# EAGLE board Task 6 - T-Junction (EAGLE 9.7.0)

Size 250.74 x 238.51 mm. Coordinates in mm from the lower left corner, seen from the top.
Outline: 0,0 250.74,0 250.74,238.51 0,238.51 0,0
Copper layers (1*16): Top 0.035mm / dielectric 1.5mm / Bottom 0.035mm
Design rules "default": minimum track width 6mil, minimum drill 0.35mm, track to track 6mil, track to pad 6mil, pad to pad 6mil, via to via 6mil, smd to smd 6mil, copper to edge 40mil, drill to drill 6mil, minimum pad ring 10mil, minimum via ring 8mil, stop-mask expansion 4mil, vias tented up to drill 0mil, thermal gap 10mil

## Footprints (pad centres in the part's own frame; a part is rotated, then mirrored left to right if it is on the bottom)
LEDRD254W60D565H860B = drill 0.981 pad 1.581: 1 -1.27,0; 2 1.27,0
LEDRD254W60D565H860B_G = drill 0.981 pad 1.581: 1 -1.27,0; 2 1.27,0
LEDRD254W60D565H860B_Y = drill 0.981 pad 1.581: 1 -1.27,0; 2 1.27,0
RESAD1016W63L850D250B = drill 0.83 pad 1.43: 1 -5.08,0; 2 5.08,0
SWITCH-MOMENTARY-PTH-6.5MM = drill 1.016 pad 1.88: 1 -3.251,2.261; 2 3.251,2.261; 3 -3.251,-2.261; 4 3.251,-2.261
ARDUINO-UNO-R3-SHIELD = drill 1.016 pad 1.88: 3.3V 24.13,-2.54; 5V 24.13,0; A0 24.13,12.7; A1 24.13,15.24; A2 24.13,17.78; A3 24.13,20.32; A4 24.13,22.86; A5 24.13,25.4; AREF -24.13,-13.97; D2 -24.13,20.32; D3 -24.13,17.78; D4 -24.13,15.24; D5 -24.13,12.7; D6 -24.13,10.16; D7 -24.13,7.62; D8 -24.13,3.81; D9 -24.13,1.27; D10 -24.13,-1.27; D11 -24.13,-3.81; D12 -24.13,-6.35; D13 -24.13,-8.89; GND@0 24.13,2.54; GND@1 24.13,5.08; GND@2 -24.13,-11.43; IOREF 24.13,-7.62; NC 24.13,-10.16; RES 24.13,-5.08; RX -24.13,25.4; SCL -24.13,-19.05; SDA -24.13,-16.51; TX -24.13,22.86; VIN 24.13,7.62

## Placement (x,y rotation side)
D1  RED  [LEDRD254W60D565H860B]  150.36,95.16 180 top
D2  GREEN  [LEDRD254W60D565H860B_G]  191,95.16 180 top
D3  YELLOW  [LEDRD254W60D565H860B_Y]  170.68,95.16 180 top
D4  GREEN  [LEDRD254W60D565H860B_G]  244.68,218.68 180 top
D5  RED  [LEDRD254W60D565H860B]  237.06,218.68 180 top
D6  GREEN  [LEDRD254W60D565H860B_G]  135.46,208.52 180 top
D7  YELLOW  [LEDRD254W60D565H860B_Y]  120.22,208.52 180 top
D8  RED  [LEDRD254W60D565H860B]  104.98,208.52 180 top
D9  RED  [LEDRD254W60D565H860B]  165.94,226.3 180 top
D10  YELLOW  [LEDRD254W60D565H860B_Y]  178.64,226.3 180 top
D11  GREEN  [LEDRD254W60D565H860B_G]  191.34,226.3 180 top
R1  1k  [RESAD1016W63L850D250B]  149.09,82.46 90 top
R2  1k  [RESAD1016W63L850D250B]  169.41,82.46 90 top
R3  1k  [RESAD1016W63L850D250B]  189.73,82.46 90 top
R4  1k  [RESAD1016W63L850D250B]  235.79,195.82 90 top
R5  1k  [RESAD1016W63L850D250B]  243.41,195.82 90 top
R9  1k  [RESAD1016W63L850D250B]  103.71,195.82 90 top
R10  1k  [RESAD1016W63L850D250B]  118.95,195.82 90 top
R11  1k  [RESAD1016W63L850D250B]  134.19,195.82 90 top
R12  1k  [RESAD1016W63L850D250B]  164.67,195.82 90 top
R13  1k  [RESAD1016W63L850D250B]  177.37,195.82 90 top
R14  1k  [RESAD1016W63L850D250B]  190.07,195.82 90 top
S1  SWITCH_MOMENTARY  [SWITCH-MOMENTARY-PTH-6.5MM]  223.09,222.49 90 top
U1  ARDUINO-UNO-R3-SHIELD  [ARDUINO-UNO-R3-SHIELD]  75.06,34.52 180 top
U3  ARDUINO-UNO-R3-SHIELD  [ARDUINO-UNO-R3-SHIELD]  29.84,190.63 180 top

## Library data of the parts
D1 D5 D8 D9 = Tinkercad; CATEGORY: Opto-Electronic; SUB-CATEGORY: LED; VALUE: LED_RED
D2 D4 D6 D11 = Tinkercad; CATEGORY: Opto-Electronic; SUB-CATEGORY: LED; VALUE: LED_GREEN
D3 D7 D10 = Tinkercad; CATEGORY: Opto-Electronic; SUB-CATEGORY: LED; VALUE: LED_YELLOW
R1-R5 R9-R14 S1 U1 U3 = Tinkercad

## Nets
D1_C: D1.2 R1.2
D2_C: D2.2 R3.2
D3_C: D3.2 R2.2
D4_C: D4.2 R5.2
D5_C: D5.2 R4.2
D6_C: D6.2 R11.2
D7_C: D7.2 R10.2
D8_C: D8.2 R9.2
D9_C: D9.2 R12.2
D10_C: D10.2 R13.2
D11_C: D11.2 R14.2
U1_D2: D2.1 U1.D2
U1_D3: D3.1 U1.D3
U1_D4: D1.1 U1.D4
U1_GND: R1.1 R2.1 R3.1 R4.1 R5.1 R9.1 R10.1 R11.1 R12.1 R13.1 R14.1 S1.1 S1.2 U1.GND@0 U1.GND@1 U1.GND@2 U3.GND@0 U3.GND@1 U3.GND@2
U3_D2: D6.1 U3.D2
U3_D3: D7.1 U3.D3
U3_D4: D8.1 U3.D4
U3_D5: D9.1 U3.D5
U3_D6: D10.1 U3.D6
U3_D7: D11.1 U3.D7
U3_D8: U1.D8 U3.D8
U3_D9: D5.1 U3.D9
U3_D10: D4.1 U3.D10
U3_D11: S1.3 S1.4 U3.D11

## Tracks (layer width: path | path; a pad name or v marks a point on that pad's centre or on a via)
D1_C  (1 unrouted)
D2_C  (1 unrouted)
D3_C  (1 unrouted)
D4_C  (1 unrouted)
D5_C  (1 unrouted)
D6_C  (1 unrouted)
D7_C  (1 unrouted)
D8_C  (1 unrouted)
D9_C  (1 unrouted)
D10_C  (1 unrouted)
D11_C  (1 unrouted)
U1_D2  (1 unrouted)
U1_D3  (1 unrouted)
U1_D4  (1 unrouted)
U1_GND  (18 unrouted)
U3_D2  (1 unrouted)
U3_D3  (1 unrouted)
U3_D4  (1 unrouted)
U3_D5  (1 unrouted)
U3_D6  (1 unrouted)
U3_D7  (1 unrouted)
U3_D8  (1 unrouted)
U3_D9  (1 unrouted)
U3_D10  (1 unrouted)
U3_D11  (2 unrouted)